# Altium PCB GateDrive.PcbDoc (part 3 of 3)
Units mm, origin at the board's own origin, x right, y up, seen from the top; angles counter-clockwise.
Board outline 204.3 x 103 mm, 4 copper layers (Top Layer, Internal Plane 1, Internal Plane 2, Bottom Layer), stack 0.778 mm thick; 236 components, 133 nets, 651 pads, 165 vias.
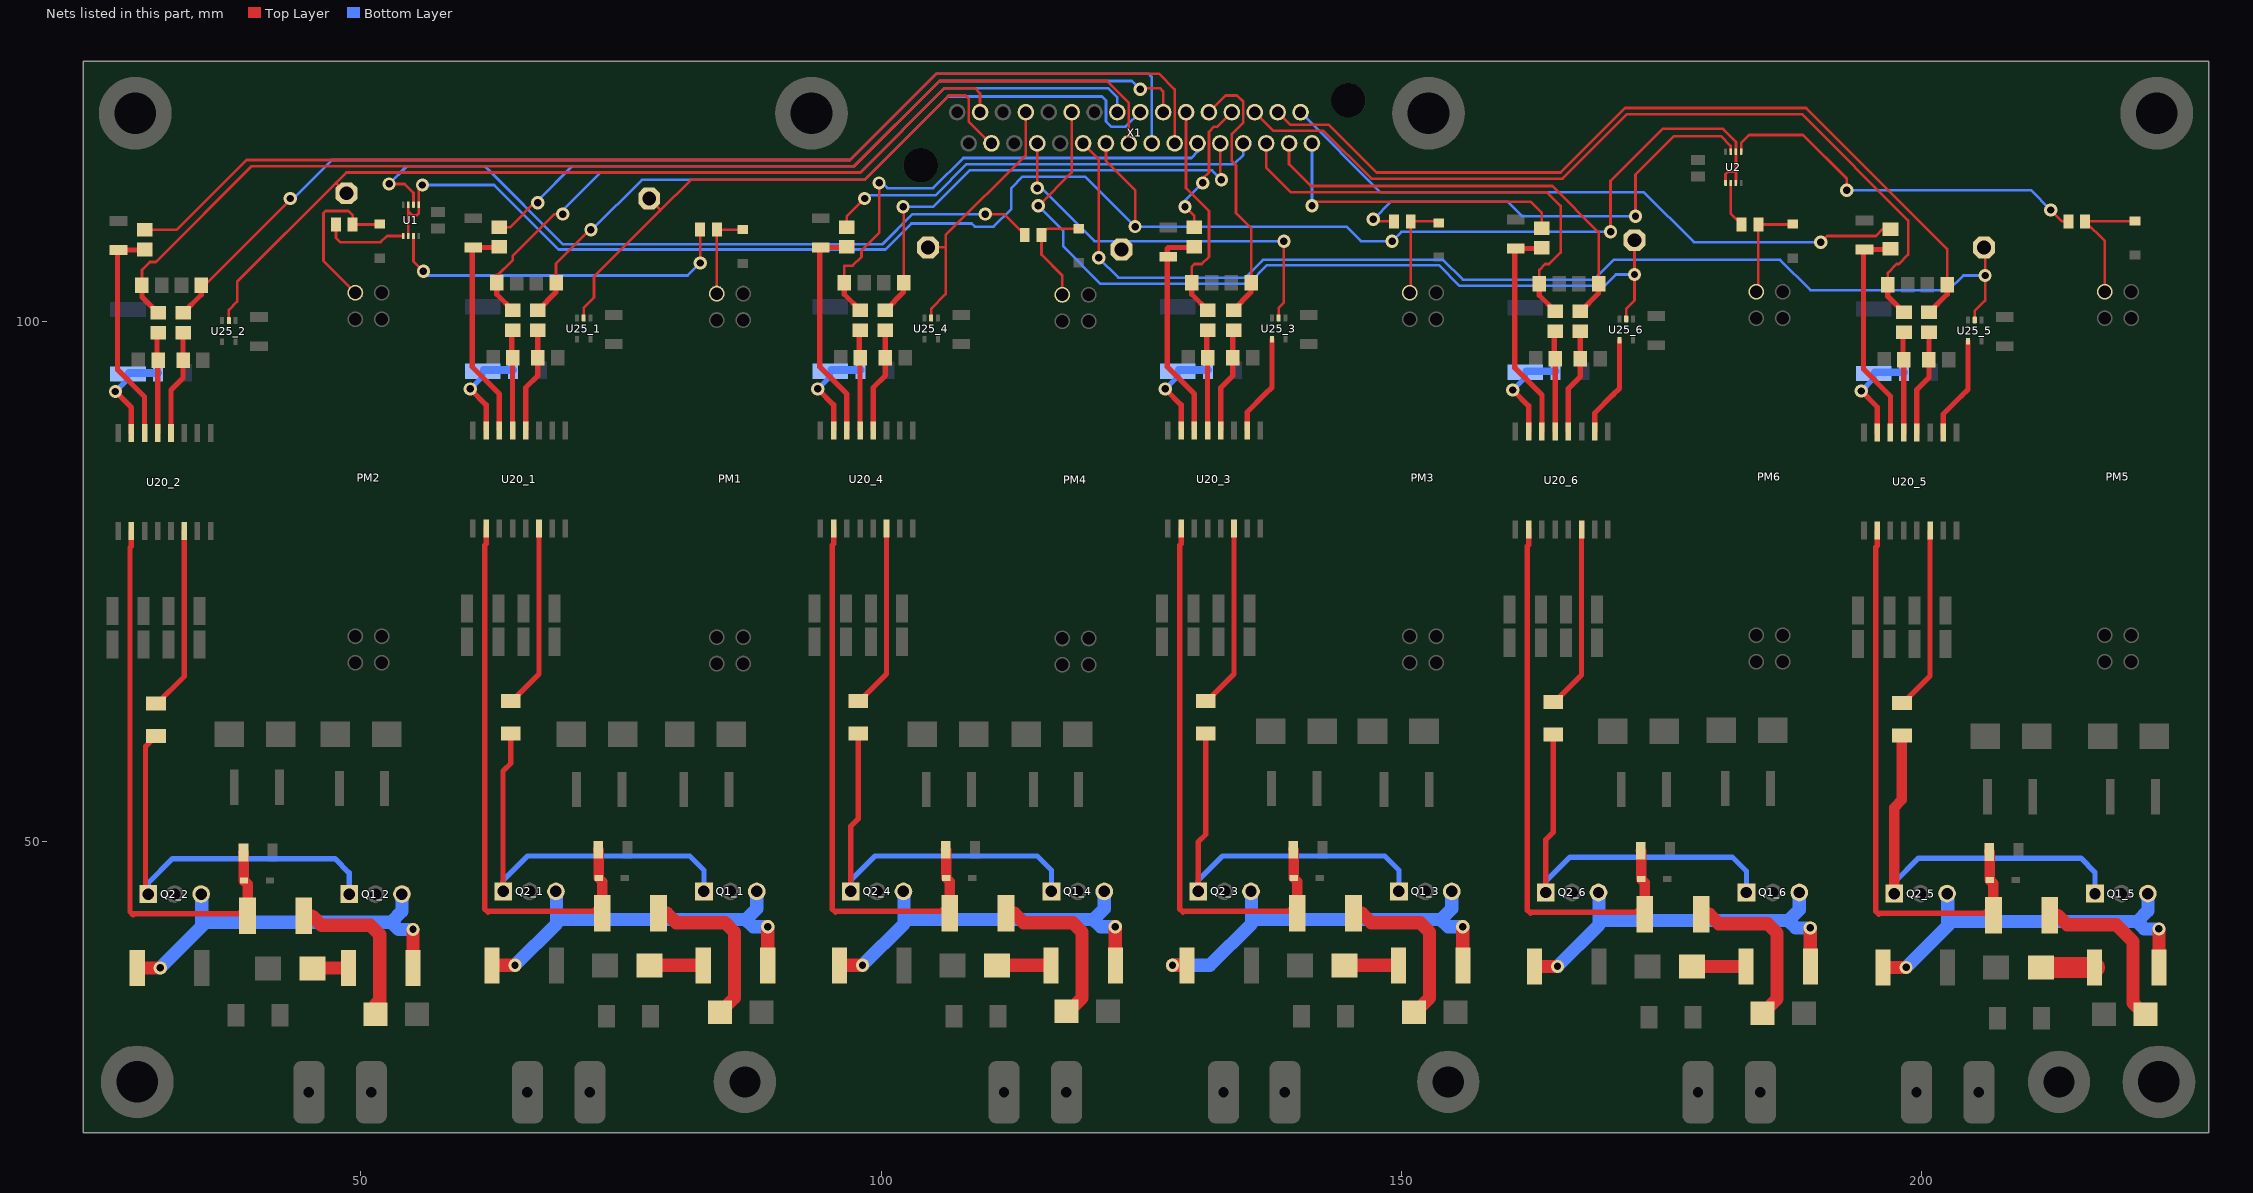
[diagram p4: the nets of this part, all layers, seen from the top]

## Via types
v1: diameter 1.27, hole 0.711, Top Layer to Bottom Layer, 154 vias
v2: diameter 2, hole 1, Top Layer to Bottom Layer, 11 vias

## Nets (pads, with @x,y where several pads share a name; then routed paths per layer and width w, separated by ;. In a path a pad name is that pad's centre, name@x,y a point inside that pad or via, vN(x,y) a via of type N, cw(c..) or ccw(c..) an arc to the next point about the centre after c; other vN are vias at no path point) (continued)
IGBT_VPHASE_T: U20_3.10 U25_3.4 | length 9.8
  Top Layer w0.508: U20_3.10@135.18,89.5 135.18,91.28 136.95,93.05 137.55,93.65 U25_3.4@137.55,98.275
IGBT_WPHASE_B: U20_6.10 U25_6.4 | length 9.8
  Top Layer w0.508: U20_6.10@168.58,89.4 168.58,91.18 170.35,92.95 170.95,93.55 U25_6.4@170.95,98.175
IGBT_WPHASE_T: U20_5.10 U25_5.4 | length 9.8
  Top Layer w0.508: U20_5.10@202.08,89.3 202.08,91.08 203.85,92.85 204.45,93.45 U25_5.4@204.45,98.075
NetC25_1: C25.1 U1.7 | length 34.3
  Top Layer w0.254: U1.7@55.05,108.2 55.05,105.75 v1(56,104.8) ; v1(82.6,105.6) C25.1@82.6,108.8
  Bottom Layer w0.254: v1(56,104.8) 56.4,104.4 81.4,104.4 v1(82.6,105.6)
NetC25_2: C25.2 D1.2 PM1.1 | length 8.7
  Top Layer w0.254: PM1.1@84.2,102.66 C25.2@84.2,108.8 86.665,108.8 D1.2@86.7,108.835
NetC26_1: C26.1 U1.5 | length 8.2
  Top Layer w0.254: C26.1@47.6,109.3 47.6,108 48,107.6 51.9,107.6 52.5,108.2 U1.5@54.05,108.2
NetC26_2: C26.2 D2.2 PM2.1 | length 15.5
  Top Layer w0.254: PM2.1@49.46,102.74 46.4,105.8 46.4,110.4 46.6,110.6 48.8,110.6 49.2,110.2 C26.2@49.2,109.3 51.765,109.3 D2.2@51.8,109.335
NetC27_1: C27.1 U2.7 | length 44.2
  Top Layer w0.254: v1(147.3,109.8) 147.5,109.6 C27.1@149.3,109.6 ; v1(172.5,110.1) 172.5,114.1 176.2,117.8 180.7,117.8 181.65,116.85 U2.7@181.65,116.3
  Bottom Layer w0.254: v1(147.3,109.8) 149,111.5 160.2,111.5 161.6,110.1 v1(172.5,110.1)
NetC27_2: C27.2 D3.2 PM3.1 | length 9.7
  Top Layer w0.254: PM3.1@150.8,102.74 150.9,102.84 C27.2@150.9,109.6 153.435,109.6 D3.2@153.6,109.435
NetC29_1: C29.1 U1.2 | length 70.8
  Top Layer w0.254: v1(52.7,113.2) 54.2,113.2 55.05,112.35 U1.2@55.05,111.2 ; v1(110,110.3) 111.8,110.3 C29.1@113.8,108.3
  Bottom Layer w0.254: v1(52.7,113.2) 54.4,114.9 61.9,114.9 69.4,107.4 100.1,107.4 103,110.3 v1(110,110.3)
NetC29_2: C29.2 D4.2 PM4.1 | length 10.4
  Top Layer w0.254: PM4.1@117.4,102.54 117.4,104.4 115.4,106.4 C29.2@115.4,108.3 116,108.9 D4.2@119,108.9
NetC30_1: C30.1 U2.5 | length 36.7
  Top Layer w0.254: U2.5@182.65,116.3 182.65,117.15 183.4,117.9 188.6,117.9 192.8,113.7 v1(192.8,112.6) ; v1(212.4,110.7) 213.5,109.6 C30.1@214.1,109.6
  Bottom Layer w0.254: v1(192.8,112.6) 210.5,112.6 v1(212.4,110.7)
NetC30_2: C30.2 D5.2 PM5.1 | length 12.4
  Top Layer w0.254: PM5.1@217.6,102.84 217.6,107.7 C30.2@215.7,109.6 220.465,109.6 D5.2@220.5,109.635
NetC31_1: C31.1 U2.2 | length 4.4
  Top Layer w0.254: U2.2@181.65,113.3 181.65,110.35 C31.1@182.7,109.3
NetC31_2: C31.2 D6.2 PM6.1 | length 9.9
  Top Layer w0.254: PM6.1@184.1,102.84 184.3,103.04 C31.2@184.3,109.3 187.565,109.3 D6.2@187.6,109.335
NetC67_1_2: C67_1.2 R44_1.2 U20_1.15 | length 9.9
  Top Layer w0.508: v1(60.5,93.5) 62.03,91.97 U20_1.15@62.03,89.5
  Bottom Layer w0.508: v1@60.6,93.5 v1(60.5,93.5) 61.7,94.7 R44_1.2@61.7,95.2 R44_1.2@61.8,95.3
  Bottom Layer w0.762: R44_1.2@61.8,95.3 C67_1.2@64.6,95.3
NetC67_2_2: C67_2.2 R44_2.2 U20_2.15 | length 9.9
  Top Layer w0.508: v1(26.4,93.25) 27.93,91.72 U20_2.15@27.93,89.25
  Bottom Layer w0.508: v1@26.5,93.25 v1(26.4,93.25) 27.6,94.45 R44_2.2@27.6,94.95 R44_2.2@27.7,95.05
  Bottom Layer w0.762: R44_2.2@27.7,95.05 C67_2.2@30.5,95.05
NetC67_3_2: C67_3.2 R44_3.2 U20_3.15 | length 9.9
  Top Layer w0.508: v1(127.3,93.5) 128.83,91.97 U20_3.15@128.83,89.5
  Bottom Layer w0.508: v1@127.4,93.5 v1(127.3,93.5) 128.5,94.7 R44_3.2@128.5,95.2 R44_3.2@128.6,95.3
  Bottom Layer w0.762: R44_3.2@128.6,95.3 C67_3.2@131.4,95.3
NetC67_4_2: C67_4.2 R44_4.2 U20_4.15 | length 9.9
  Top Layer w0.508: v1(93.9,93.5) 95.43,91.97 U20_4.15@95.43,89.5
  Bottom Layer w0.508: v1@94,93.5 v1(93.9,93.5) 95.1,94.7 R44_4.2@95.1,95.2 R44_4.2@95.2,95.3
  Bottom Layer w0.762: R44_4.2@95.2,95.3 C67_4.2@98,95.3
NetC67_5_2: C67_5.2 R44_5.2 U20_5.15 | length 9.9
  Top Layer w0.508: v1(194.2,93.3) 195.73,91.77 U20_5.15@195.73,89.3
  Bottom Layer w0.508: v1@194.3,93.3 v1(194.2,93.3) 195.4,94.5 R44_5.2@195.4,95 R44_5.2@195.5,95.1
  Bottom Layer w0.762: R44_5.2@195.5,95.1 C67_5.2@198.3,95.1
NetC67_6_2: C67_6.2 R44_6.2 U20_6.15 | length 9.9
  Top Layer w0.508: v1(160.7,93.4) 162.23,91.87 U20_6.15@162.23,89.4
  Bottom Layer w0.508: v1@160.8,93.4 v1(160.7,93.4) 161.9,94.6 R44_6.2@161.9,95.1 R44_6.2@162,95.2
  Bottom Layer w0.762: R44_6.2@162,95.2 C67_6.2@164.8,95.2
NetC72_1_2: C72_1.2 R47_1.1 U20_1.14 | length 21.2
  Top Layer w0.508: U20_1.14@63.3,89.5 63.3,93 60.7,95.6 60.7,107 C72_1.2@60.8,107.1 63.25,107.1 R47_1.1@63.3,107.15
NetC72_2_2: C72_2.2 R47_2.1 U20_2.14 | length 21.2
  Top Layer w0.508: U20_2.14@29.2,89.25 29.2,92.75 26.6,95.35 26.6,106.75 C72_2.2@26.7,106.85 29.15,106.85 R47_2.1@29.2,106.9
NetC72_3_2: C72_3.2 R47_3.1 U20_3.14 | length 21.2
  Top Layer w0.508: U20_3.14@130.1,89.5 130.1,93 127.5,95.6 127.5,107 127.6,107.1 130.05,107.1 R47_3.1@130.1,107.15
NetC72_4_2: C72_4.2 R47_4.1 U20_4.14 | length 21.2
  Top Layer w0.508: U20_4.14@96.7,89.5 96.7,93 94.1,95.6 94.1,107 C72_4.2@94.2,107.1 96.65,107.1 R47_4.1@96.7,107.15
NetC72_5_2: C72_5.2 R47_5.1 U20_5.14 | length 21.2
  Top Layer w0.508: U20_5.14@197,89.3 197,92.8 194.4,95.4 194.4,106.8 C72_5.2@194.5,106.9 196.95,106.9 R47_5.1@197,106.95
NetC72_6_2: C72_6.2 R47_6.1 U20_6.14 | length 21.2
  Top Layer w0.508: U20_6.14@163.5,89.4 163.5,92.9 160.9,95.5 160.9,106.9 C72_6.2@161,107 163.45,107 R47_6.1@163.5,107.05
NetC(Desat)1_1_2: C(Desat)1_1.2 D25_1.1 R43_1.1 U20_1.2 | length 54.8
  Top Layer w0.508: U20_1.2@62.03,80.102 62.03,78.63 61.9,78.5 61.9,43.5 62.2,43.2 62.2,43.3 72.3,43.3 73.2,44.2 R43_1.1@73.2,43.1
  Top Layer w1.016: 72.8,49.2 72.85,49.15 D25_1.1@72.85,46.5 73.2,46.15 R43_1.1@73.2,44.2
NetC(Desat)1_2_2: C(Desat)1_2.2 D25_2.1 R43_2.1 U20_2.2 | length 54.8
  Top Layer w0.508: U20_2.2@27.93,79.852 27.93,78.38 27.8,78.25 27.8,43.25 28.1,42.95 28.1,43.05 38.2,43.05 39.1,43.95 R43_2.1@39.1,42.85
  Top Layer w1.016: 38.7,48.95 38.75,48.9 D25_2.1@38.75,46.25 39.1,45.9 R43_2.1@39.1,43.95
NetC(Desat)1_3_2: C(Desat)1_3.2 D25_3.1 R43_3.1 U20_3.2 | length 54.8
  Top Layer w0.508: U20_3.2@128.83,80.102 128.83,78.63 128.7,78.5 128.7,43.5 129,43.2 129,43.3 139.1,43.3 140,44.2 R43_3.1@140,43.1
  Top Layer w1.016: 139.6,49.2 139.65,49.15 D25_3.1@139.65,46.5 140,46.15 R43_3.1@140,44.2
NetC(Desat)1_4_2: C(Desat)1_4.2 D25_4.1 R43_4.1 U20_4.2 | length 54.8
  Top Layer w0.508: U20_4.2@95.43,80.102 95.43,78.63 95.3,78.5 95.3,43.5 95.6,43.2 95.6,43.3 105.7,43.3 106.6,44.2 R43_4.1@106.6,43.1
  Top Layer w1.016: 106.2,49.2 106.25,49.15 D25_4.1@106.25,46.5 106.6,46.15 R43_4.1@106.6,44.2
NetC(Desat)1_5_2: C(Desat)1_5.2 D25_5.1 R43_5.1 U20_5.2 | length 54.8
  Top Layer w0.508: U20_5.2@195.73,79.902 195.73,78.43 195.6,78.3 195.6,43.3 195.9,43 195.9,43.1 206,43.1 206.9,44 R43_5.1@206.9,42.9
  Top Layer w1.016: 206.5,49 206.55,48.95 D25_5.1@206.55,46.3 206.9,45.95 R43_5.1@206.9,44
NetC(Desat)1_6_2: C(Desat)1_6.2 D25_6.1 R43_6.1 U20_6.2 | length 54.8
  Top Layer w0.508: U20_6.2@162.23,80.002 162.23,78.53 162.1,78.4 162.1,43.4 162.4,43.1 162.4,43.2 172.5,43.2 173.4,44.1 R43_6.1@173.4,43
  Top Layer w1.016: 173,49.1 173.05,49.05 D25_6.1@173.05,46.4 173.4,46.05 R43_6.1@173.4,44.1
NetD27_1_2: D27_1.2 RG1_1.2 | length 5.2
  Top Layer w1.27: D27_1.2@77.75,38.1 RG1_1.2@82.9,38.1
NetD27_2_2: D27_2.2 RG1_2.2 | length 3.3
  Top Layer w1.27: D27_2.2@45.5,37.85 RG1_2.2@48.8,37.85
NetD27_3_2: D27_3.2 RG1_3.2 | length 5.2
  Top Layer w1.27: D27_3.2@144.55,38.1 RG1_3.2@149.7,38.1
NetD27_4_2: D27_4.2 RG1_4.2 | length 5.2
  Top Layer w1.27: D27_4.2@111.15,38.1 RG1_4.2@116.3,38.1
NetD27_5_2: D27_5.2 RG1_5.2 | length 5.2
  Top Layer w2: D27_5.2@211.45,37.9 RG1_5.2@216.6,37.9
NetD27_6_2: D27_6.2 RG1_6.2 | length 5.2
  Top Layer w1.27: D27_6.2@177.95,38 RG1_6.2@183.1,38
NetD125_2: D125.2 R43_1.2 | length 16.3
  Top Layer w1.27: R43_1.2@78.6,43.1 79.4,43.1 80.3,42.2 85,42.2 85.9,41.3 85.9,34.994 D125.2@84.506,33.6
NetD126_2: D126.2 R43_2.2 | length 15.6
  Top Layer w1.27: R43_2.2@44.5,42.85 45.3,42.85 46.2,41.95 50.9,41.95 51.8,41.05 51.8,34.744 51.4,34.344 D126.2@51.4,33.7
NetD127_2: D127.2 R43_3.2 | length 16.3
  Top Layer w1.27: R43_3.2@145.4,43.1 146.2,43.1 147.1,42.2 151.8,42.2 152.7,41.3 152.7,34.994 D127.2@151.306,33.6
NetD128_2: D128.2 R43_4.2 | length 16.3
  Top Layer w1.27: R43_4.2@112,43.1 112.8,43.1 113.7,42.2 118.4,42.2 119.3,41.3 119.3,34.994 D128.2@117.906,33.6
NetD129_2: D129.2 R43_5.2 | length 16.5
  Top Layer w1.27: R43_5.2@212.3,42.9 213.1,42.9 214,42 218.7,42 220.3,40.4 220.3,34.494 D129.2@221.394,33.4
NetD130_2: D130.2 R43_6.2 | length 16.3
  Top Layer w1.27: R43_6.2@178.8,43 179.6,43 180.5,42.1 185.2,42.1 186.1,41.2 186.1,34.894 D130.2@184.706,33.5
NetQ1_1_1: Q1_1.1 Q2_1.1 RB1_1.2 | length 39.4
  Top Layer w0.508: Q2_1.1@63.66,45.2 63.66,56.76 64.4,57.5 RB1_1.2@64.4,60.4
  Bottom Layer w0.508: Q2_1.1@63.66,45.2 63.66,46.26 66,48.6 81.6,48.6 82.96,47.24 Q1_1.1@82.96,45.2
NetQ1_1_3: Q1_1.3 Q2_1.3 RG1_1.1 RG2_1.1 | length 38.7
  Top Layer w1.27: RG2_1.1@62.6,38.1 v1(64.8,38.1) ; RG1_1.1@89.1,38.1 v1(89.1,41.8)
  Bottom Layer w1.27: v1(64.8,38.1) 68.8,42.1 68.8,43.1 ; Q2_1.3@68.74,45.2 68.8,45.14 68.8,43.1 ; Q1_1.3@88.04,45.2 88.04,43.54 87,42.5 ; v1(89.1,41.8) 87.7,41.8 87,42.5 ; 68.8,43.1 69.4,42.5 87,42.5
NetQ1_2_1: Q1_2.1 Q2_2.1 RB1_2.2 | length 39.7
  Top Layer w0.508: Q2_2.1@29.56,44.95 29.3,45.21 29.3,59.15 RB1_2.2@30.3,60.15
  Bottom Layer w0.508: Q2_2.1@29.56,44.95 29.56,46.01 31.9,48.35 47.5,48.35 48.86,46.99 Q1_2.1@48.86,44.95
NetQ1_2_3: Q1_2.3 Q2_2.3 RG1_2.1 RG2_2.1 | length 38.7
  Top Layer w1.27: RG2_2.1@28.5,37.85 v1(30.7,37.85) ; RG1_2.1@55,37.85 v1(55,41.55)
  Bottom Layer w1.27: v1(30.7,37.85) 34.7,41.85 34.7,42.85 ; Q2_2.3@34.64,44.95 34.7,44.89 34.7,42.85 ; Q1_2.3@53.94,44.95 53.94,43.29 52.9,42.25 ; v1(55,41.55) 53.6,41.55 52.9,42.25 ; 34.7,42.85 35.3,42.25 52.9,42.25
NetQ1_3_1: Q1_3.1 Q2_3.1 RB1_3.2 | length 39.4
  Top Layer w0.508: Q2_3.1@130.46,45.2 130.46,49.96 131.2,50.7 RB1_3.2@131.2,60.4
  Bottom Layer w0.508: Q2_3.1@130.46,45.2 130.46,46.26 132.8,48.6 148.4,48.6 149.76,47.24 Q1_3.1@149.76,45.2
NetQ1_3_3: Q1_3.3 Q2_3.3 RG1_3.1 RG2_3.1 | length 41.5
  Top Layer w1.27: v1(128,38.1) RG2_3.1@129.4,38.1 ; RG1_3.1@155.9,38.1 v1(155.9,41.8)
  Bottom Layer w1.27: v1(128,38.1) 131.6,38.1 135.6,42.1 135.6,43.1 ; Q2_3.3@135.54,45.2 135.6,45.14 135.6,43.1 ; Q1_3.3@154.84,45.2 154.84,43.54 153.8,42.5 ; v1(155.9,41.8) 154.5,41.8 153.8,42.5 ; 135.6,43.1 136.2,42.5 153.8,42.5
NetQ1_4_1: Q1_4.1 Q2_4.1 RB1_4.2 | length 39.4
  Top Layer w0.508: Q2_4.1@97.06,45.2 97.06,51.46 97.8,52.2 RB1_4.2@97.8,60.4
  Bottom Layer w0.508: Q2_4.1@97.06,45.2 97.06,46.26 99.4,48.6 115,48.6 116.36,47.24 Q1_4.1@116.36,45.2
NetQ1_4_3: Q1_4.3 Q2_4.3 RG1_4.1 RG2_4.1 | length 38.7
  Top Layer w1.27: RG2_4.1@96,38.1 v1(98.2,38.1) ; RG1_4.1@122.5,38.1 v1(122.5,41.8)
  Bottom Layer w1.27: v1(98.2,38.1) 102.2,42.1 102.2,43.1 ; Q2_4.3@102.14,45.2 102.2,45.14 102.2,43.1 ; Q1_4.3@121.44,45.2 121.44,43.54 120.4,42.5 ; v1(122.5,41.8) 121.1,41.8 120.4,42.5 ; 102.2,43.1 102.8,42.5 120.4,42.5
NetQ1_5_1: Q1_5.1 Q2_5.1 RB1_5.2 | length 39.4
  Top Layer w1: Q2_5.1@197.36,45 197.36,53.26 198.1,54 RB1_5.2@198.1,60.2
  Bottom Layer w0.508: Q2_5.1@197.36,45 197.36,46.06 199.7,48.4 215.3,48.4 216.66,47.04 Q1_5.1@216.66,45
NetQ1_5_3: Q1_5.3 Q2_5.3 RG1_5.1 RG2_5.1 | length 38.7
  Top Layer w1.27: RG2_5.1@196.3,37.9 v1(198.5,37.9) ; RG1_5.1@222.8,37.9 v1(222.8,41.6)
  Bottom Layer w1.27: v1(198.5,37.9) 202.5,41.9 202.5,42.9 ; Q2_5.3@202.44,45 202.5,44.94 202.5,42.9 ; Q1_5.3@221.74,45 221.74,43.34 220.7,42.3 ; v1(222.8,41.6) 221.4,41.6 220.7,42.3 ; 202.5,42.9 203.1,42.3 220.7,42.3
NetQ1_6_1: Q1_6.1 Q2_6.1 RB1_6.2 | length 39.4
  Top Layer w0.508: Q2_6.1@163.86,45.1 163.86,50.16 164.6,50.9 RB1_6.2@164.6,60.3
  Bottom Layer w0.508: Q2_6.1@163.86,45.1 163.86,46.16 166.2,48.5 181.8,48.5 183.16,47.14 Q1_6.1@183.16,45.1
NetQ1_6_3: Q1_6.3 Q2_6.3 RG1_6.1 RG2_6.1 | length 38.7
  Top Layer w1.27: RG2_6.1@162.8,38 v1(165,38) ; RG1_6.1@189.3,38 v1(189.3,41.7)
  Bottom Layer w1.27: v1(165,38) 169,42 169,43 ; Q2_6.3@168.94,45.1 169,45.04 169,43 ; Q1_6.3@188.24,45.1 188.24,43.44 187.2,42.4 ; v1(189.3,41.7) 187.9,41.7 187.2,42.4 ; 169,43 169.6,42.4 187.2,42.4
NetR45_1_1: R45_1.1 R94_1.1 U20_1.13 | length 9.7
  Top Layer w0.508: R94_1.1@64.5,99.15 64.5,96.54 64.57,96.47 U20_1.13@64.57,89.5
NetR45_2_1: R45_2.1 R94_2.1 U20_2.13 | length 9.7
  Top Layer w0.508: R94_2.1@30.4,98.9 30.4,96.29 30.47,96.22 U20_2.13@30.47,89.25
NetR45_3_1: R45_3.1 R94_3.1 U20_3.13 | length 9.7
  Top Layer w0.508: R94_3.1@131.3,99.15 131.3,96.54 131.37,96.47 U20_3.13@131.37,89.5
NetR45_4_1: R45_4.1 R94_4.1 U20_4.13 | length 9.7
  Top Layer w0.508: R94_4.1@97.9,99.15 97.9,96.54 97.97,96.47 U20_4.13@97.97,89.5
NetR45_5_1: R45_5.1 R94_5.1 U20_5.13 | length 9.7
  Top Layer w0.508: R94_5.1@198.2,98.95 198.2,96.34 198.27,96.27 U20_5.13@198.27,89.3
NetR45_6_1: R45_6.1 R94_6.1 U20_6.13 | length 9.7
  Top Layer w0.508: R94_6.1@164.7,99.05 164.7,96.44 164.77,96.37 U20_6.13@164.77,89.4
NetR46_1_1: R46_1.1 R93_1.1 U20_1.12 | length 10.1
  Top Layer w0.508: U20_1.12@65.84,89.5 65.84,93.64 67,94.8 R46_1.1@67,96.5 R93_1.1@67,99.15
NetR46_2_1: R46_2.1 R93_2.1 U20_2.12 | length 10.1
  Top Layer w0.508: U20_2.12@31.74,89.25 31.74,93.39 32.9,94.55 R46_2.1@32.9,96.25 R93_2.1@32.9,98.9
NetR46_3_1: R46_3.1 R93_3.1 U20_3.12 | length 10.1
  Top Layer w0.508: U20_3.12@132.64,89.5 132.64,93.64 133.8,94.8 R46_3.1@133.8,96.5 R93_3.1@133.8,99.15
NetR46_4_1: R46_4.1 R93_4.1 U20_4.12 | length 10.1
  Top Layer w0.508: U20_4.12@99.24,89.5 99.24,93.64 100.4,94.8 R46_4.1@100.4,96.5 R93_4.1@100.4,99.15
NetR46_5_1: R46_5.1 R93_5.1 U20_5.12 | length 10.1
  Top Layer w0.508: U20_5.12@199.54,89.3 199.54,93.44 200.7,94.6 R46_5.1@200.7,96.3 R93_5.1@200.7,98.95
NetR46_6_1: R46_6.1 R93_6.1 U20_6.12 | length 10.1
  Top Layer w0.508: U20_6.12@166.04,89.4 166.04,93.54 167.2,94.7 R46_6.1@167.2,96.4 R93_6.1@167.2,99.05
NetR47_1_2: R47_1.2 X1.19 | length 72.2
  Top Layer w0.254: R47_1.2@63.3,109.05 64.35,109.05 66.7,111.4 v1(67,111.4) ; v1(124.9,122.3) 125,122.4 126.8,122.4 127.1,122.1 X1.19@127.1,120.1
  Bottom Layer w0.254: v1(67,111.4) 67,111.6 70.3,114.9 97.4,114.9 105.6,123.1 124.1,123.1 v1(124.9,122.3)
NetR47_2_2: R47_2.2 X1.20 | length 111
  Top Layer w0.254: R47_2.2@29.2,108.8 32.3,108.8 39,115.5 97,115.5 105.3,123.8 126.7,123.8 128.2,122.3 X1.20@128.2,117.1
NetR47_3_2: R47_3.2 X1.25 | length 13.5
  Top Layer w0.254: v1(129.2,111) 130.1,110.1 R47_3.2@130.1,109.05 ; v1(130.9,113.3) 130.9,113.7 131.5,114.3 131.5,118.2 132,118.7 132.3,118.7 X1.25@133.7,120.1
  Bottom Layer w0.254: v1(129.2,111) 129.2,111.6 v1(130.9,113.3)
NetR47_4_2: R47_4.2 X1.26 | length 42.7
  Top Layer w0.254: R47_4.2@96.7,109.05 96.7,110.1 v1(98.4,111.8)
  Bottom Layer w0.254: v1(98.4,111.8) 98.7,112.1 105.2,112.1 108.2,115.1 133.9,115.1 134.8,116 X1.26@134.8,117.1
NetR47_5_2: R47_5.2 X1.31 | length 62.4
  Top Layer w0.254: v1(190.3,107.6) 190.9,108.2 195.6,108.2 196.25,108.85 R47_5.2@197,108.85
  Bottom Layer w0.254: X1.31@140.3,120.1 148,112.4 173.3,112.4 178.1,107.6 v1(190.3,107.6)
NetR47_6_2: R47_6.2 X1.32 | length 30.2
  Top Layer w0.254: v1(141.4,111.1) 141.8,111.5 162.4,111.5 163.5,110.4 R47_6.2@163.5,108.95
  Bottom Layer w0.254: v1(141.4,111.1) X1.32@141.4,117.1
NetR93_1_2: R93_1.2 R95_1.1 X1.17 | length 71
  Top Layer w0.254: R95_1.1@68.75,103.4 R95_1.1@68.75,103.7 68.75,105.55 72,108.8 v1(72.1,108.8)
  Top Layer w0.508: R93_1.2@67,101.05 68.75,102.8 R95_1.1@68.75,103.4
  Bottom Layer w0.254: v1(72.1,108.8) 72.2,108.8 77,113.6 98.4,113.6 106.4,121.6 121.2,121.6 121.6,121.2 121.6,119.2 122.1,118.7 123.5,118.7 X1.17@124.9,120.1
NetR93_2_2: R93_2.2 R95_2.1 X1.18 | length 109.9
  Top Layer w0.254: R95_2.1@34.65,103.45 34.95,103.45 43.3,111.8 v1(43.2,111.8)
  Top Layer w0.508: R93_2.2@32.9,100.8 34.65,102.55 R95_2.1@34.65,103.45
  Bottom Layer w0.254: v1(43.2,111.8) 43.5,111.8 47.2,115.5 97,115.5 105.3,123.8 125.7,123.8 126,123.5 X1.18@126,117.1
NetR93_3_2: R93_3.2 R95_3.1 X1.23 | length 26.2
  Top Layer w0.254: X1.23@131.5,120.1 133.1,121.7 134.2,121.7 134.8,121.1 134.8,119.1 133.7,118 133.7,115.4 134.1,115 134.1,110.4 135.55,108.95 R95_3.1@135.55,103.7
  Top Layer w0.508: R93_3.2@133.8,101.05 135.55,102.8 R95_3.1@135.55,103.7
NetR93_4_2: R93_4.2 R95_4.1 X1.24 | length 46.7
  Top Layer w0.254: v1(102.1,111) 102.15,110.95 R95_4.1@102.15,103.7 ; X1.24@132.6,117.1 132.6,113.7 v1(132.7,113.6)
  Top Layer w0.508: R93_4.2@100.4,101.05 102.15,102.8 R95_4.1@102.15,103.7
  Bottom Layer w0.254: v1(102.1,111) 105,111 108.5,114.5 131.8,114.5 v1(132.7,113.6)
NetR93_5_2: R93_5.2 R95_5.1 X1.29 | length 81.8
  Top Layer w0.254: X1.29@138.1,120.1 139.3,118.9 143,118.9 147.6,114.3 165.3,114.3 171.5,120.5 188.9,120.5 202.45,106.95 R95_5.1@202.45,103.5
  Top Layer w0.508: R93_5.2@200.7,100.85 202.45,102.6 R95_5.1@202.45,103.5
NetR93_6_2: R93_6.2 R95_6.1 X1.30 | length 42.8
  Top Layer w0.254: X1.30@139.2,117.1 139.2,115.1 141.3,113 164.5,113 168.95,108.55 R95_6.1@168.95,103.6
  Top Layer w0.508: R93_6.2@167.2,100.95 168.95,102.7 R95_6.1@168.95,103.6
NetR94_1_2: R94_1.2 R96_1.1 X1.15 | length 73.3
  Top Layer w0.254: R96_1.1@63.05,104.35 64.6,105.9 64.6,106.3 68.6,110.3 v1(69.4,110.3)
  Top Layer w0.508: R96_1.1@63.05,104.35 R96_1.1@63.05,103.7 63.05,102.6 R94_1.2@64.6,101.05
  Bottom Layer w0.254: v1(69.4,110.3) 69.4,110.7 73,114.3 98,114.3 106.1,122.4 121.8,122.4 122.7,121.5 X1.15@122.7,120.096
NetR94_2_2: R94_2.2 R96_2.1 X1.16 | length 111.9
  Top Layer w0.254: R96_2.1@28.95,103.45 28.95,104.95 29.7,105.7 30.3,105.7 39.5,114.9 97.4,114.9 105.6,123.1 121.7,123.1 123.8,121 X1.16@123.8,117.1
  Top Layer w0.508: R96_2.1@28.95,103.45 28.95,102.35 R94_2.2@30.5,100.8
NetR94_3_2: R94_3.2 R96_3.1 X1.21 | length 21.7
  Top Layer w0.254: X1.21@129.3,120.1 129.3,112.8 131.5,110.6 131.5,106.2 130.8,105.5 130.1,105.5 129.85,105.25 R96_3.1@129.85,103.7
  Top Layer w0.508: R96_3.1@129.85,103.7 129.85,102.6 R94_3.2@131.4,101.05
NetR94_4_2: R94_4.2 R96_4.1 X1.22 | length 48.2
  Top Layer w0.254: R96_4.1@96.45,103.7 96.45,105.35 97.25,105.35 98.1,106.2 98.1,106.8 99.8,108.5 v1(99.8,113.3)
  Top Layer w0.508: R96_4.1@96.45,103.7 96.45,102.6 R94_4.2@98,101.05
  Bottom Layer w0.254: v1(99.8,113.3) 99.8,113.6 100.6,112.8 105,112.8 107.9,115.7 129.8,115.7 130.4,116.3 X1.22@130.4,117.1
NetR94_5_2: R94_5.2 R96_5.1 X1.27 | length 82.7
  Top Layer w0.254: X1.27@135.9,120.1 137.7,118.3 142.5,118.3 147.1,113.7 165.5,113.7 171.7,119.9 188.5,119.9 198.7,109.7 198.7,106.4 197.8,105.5 197.6,105.5 196.75,104.65 R96_5.1@196.75,103.5
  Top Layer w0.508: R96_5.1@196.75,103.5 196.75,102.4 R94_5.2@198.3,100.85
NetR94_6_2: R94_6.2 R96_6.1 X1.28 | length 44
  Top Layer w0.254: X1.28@137,117.1 137,114.8 139.4,112.4 164,112.4 165.3,111.1 165.3,106.6 164.2,105.5 163.8,105.5 163.25,104.95 R96_6.1@163.25,103.6
  Top Layer w0.508: R96_6.1@163.25,103.6 163.25,102.5 R94_6.2@164.8,100.95
NetRB1_1_1: RB1_1.1 U20_1.6 | length 17.8
  Top Layer w0.508: RB1_1.1@64.4,63.5 64.5,63.5 67.11,66.11 U20_1.6@67.11,80.102
NetRB1_2_1: RB1_2.1 U20_2.6 | length 17.8
  Top Layer w0.508: RB1_2.1@30.3,63.25 30.4,63.25 33.01,65.86 U20_2.6@33.01,79.852
NetRB1_3_1: RB1_3.1 U20_3.6 | length 17.8
  Top Layer w0.508: RB1_3.1@131.2,63.5 131.3,63.5 133.91,66.11 U20_3.6@133.91,80.102
NetRB1_4_1: RB1_4.1 U20_4.6 | length 17.8
  Top Layer w0.508: RB1_4.1@97.8,63.5 97.9,63.5 100.51,66.11 U20_4.6@100.51,80.102
NetRB1_5_1: RB1_5.1 U20_5.6 | length 17.8
  Top Layer w0.508: RB1_5.1@198.1,63.3 198.2,63.3 200.81,65.91 U20_5.6@200.81,79.902
NetRB1_6_1: RB1_6.1 U20_6.6 | length 17.8
  Top Layer w0.508: RB1_6.1@164.6,63.4 164.7,63.4 167.31,66.01 U20_6.6@167.31,80.002
NetU1_1: U1.1 U1.3 U1.6 U2.1 U2.3 U2.6 X1.14 | length 165.7
  Top Layer w0.254: U1.6@54.55,108.2 54.55,110.55 ; U1.3@54.55,111.2 54.55,110.55 ; v1(55.9,113.1) 55.55,112.75 U1.1@55.55,111.2 55.55,110.35 55.4,110.2 54.9,110.2 54.55,110.55 ; X1.14@121.6,117.1 121.6,115.4 124.4,112.6 v1(124.4,109.1) ; v1(170.1,108.6) 170.1,113.5 175.1,118.5 180.9,118.5 182.15,117.25 U2.6@182.15,116.3 182.15,114.4 ; U2.1@181.15,113.3 181.15,114.15 181.4,114.4 182.15,114.4 ; U2.3@182.15,113.3 182.15,114.4
  Bottom Layer w0.254: v1(55.9,113.1) 62.8,113.1 69,106.9 100.4,106.9 102.9,109.4 108.7,109.4 109,109.1 110.8,109.1 112.5,110.8 112.5,112.8 113.6,113.9 119.6,113.9 v1(124.4,109.1) 144.7,109.1 146.1,107.7 v1(149.1,107.7) 150,108.6 v1(170.1,108.6)
PA8/TIM_CH1: TP2.TP U25_1.2 X1.4 | length 54.6
  Top Layer w0.254: U25_1.2@71.4,100.325 71.4,101.3 72.4,102.3 72.4,104.3 78.75,110.65 ; TP2.TP@77.7,111.8 78.75,110.75 78.75,110.65 ; X1.4@110.6,117.1 110.5,117.1 108.4,119.2 108.4,121.4 108.1,121.7 106.5,121.7 98.4,113.6 81.7,113.6 78.75,110.65
PA9/TIM_CH2: TP4.TP U25_3.2 X1.8 | length 37.7
  Top Layer w0.254: v1(115,112.8) X1.8@115,117.1 ; U25_3.2@138.2,100.325 138.2,101.3 138.7,101.8 v1(138.7,107.7)
  Bottom Layer w0.254: v1(115,112.8) 115.4,112.8 120.5,107.7 v1(138.7,107.7)
PA10/TIM1_CH3: TP6.TP U25_5.2 X1.12 | length 109.1
  Top Layer w0.254: X1.12@119.4,117.1 120.9,115.6 v1(120.9,106.1) ; U25_5.2@205.1,100.125 205.1,101 206.1,102 v1(206.1,104.4) 206.1,107 TP6.TP@206,107.1
  Bottom Layer w0.254: v1(120.9,106.1) 122.8,104.2 135,104.2 136.7,105.9 154,105.9 155.9,104 168.5,104 170.4,105.9 186.4,105.9 189.3,103 202.6,103 204,104.4 v1(206.1,104.4)
TIM1_CH1N: TP1.TP U25_2.2 X1.3 | length 86.6
  Top Layer w0.254: U25_2.2@37.3,100.075 37.3,101.1 38.1,101.9 38.1,103.8 47.6,113.3 ; TP1.TP@48.6,112.3 47.6,113.3 ; X1.3@109.5,120.1 109.5,121.9 109,122.4 106.1,122.4 98,114.3 48.6,114.3 47.6,113.3
TIM1_CH2N: TP3.TP U25_4.2 X1.7 | length 25.2
  Top Layer w0.254: TP3.TP@104.5,107.1 106.2,107.1 ; U25_4.2@104.8,100.325 104.8,101.2 106.2,102.6 106.2,108.3 113.9,116 X1.7@113.9,120.1
TIM1_CH3N: TP5.TP U25_6.2 X1.11 | length 81.5
  Top Layer w0.254: v1(115.1,111.1) 118.3,114.3 X1.11@118.3,120.1 ; U25_6.2@171.6,100.225 171.6,101.2 172.4,102 v1(172.4,104.5) TP5.TP@172.4,107.8
  Bottom Layer w0.254: v1(115.1,111.1) 117.5,108.7 117.5,107.2 121.1,103.6 135.3,103.6 137.1,105.4 153.6,105.4 155.6,103.4 169.5,103.4 170.6,104.5 v1(172.4,104.5)
pads on no net: PM1.5 PM2.5 PM3.5 PM4.5 PM5.5 PM6.5 U20_1.4 U20_1.7 U20_2.4 U20_2.7 U20_3.4 U20_3.7 U20_4.4 U20_4.7 U20_5.4 U20_5.7 U20_6.4 U20_6.7 U25_1.1 U25_2.1 U25_3.1 U25_4.1 U25_5.1 U25_6.1 X1.33 X1.34
copper on no net:
  other v1: 166.2,32.5 99.4,32.6

## Polygon pours and split planes (outlines as drawn)
COMMON3 on Internal Plane 1 (split plane): 143,72.5 157.298,72.5 157.298,32.202 126.102,32.202 126.102,81.2 143,81.2
COMMON4 on Internal Plane 1 (split plane): 109.7,72.2 124.098,72.2 124.098,32.202 92.702,32.202 92.702,81.2 109.7,81.2
COMMON5 on Internal Plane 1 (split plane): 209.8,72.4 225.3,72.4 225.3,32.202 192.802,32.202 192.802,81.2 209.8,81.2
COMMON6 on Internal Plane 1 (split plane): 176.4,72.3 190.798,72.3 190.798,32.202 159.302,32.202 159.302,81.2 176.4,81.2
GND on Internal Plane 1 (split plane): 227.09,94.6 209.8,94.6 209.8,89 191.1,89 191.1,94.8 176.4,94.8 176.4,89 157.7,89 157.7,94.5 143,94.5 143,89 124.4,89 124.4,94.3 109.7,94.3 109.7,89 91.6,89 91.6,94.1 76.5,94.1 76.5,89 57.7,89 57.7,94.9 41.9,94.9 41.9,89 23.81,89 23.81,124.49 227.09,124.49
COMMON2 on Internal Plane 1 (split plane): 41.9,72.5 57.298,72.5 57.298,32.202 25.3,32.202 25.3,81.2 41.9,81.2
COMMON1 on Internal Plane 1 (split plane): 76.5,71.7 90.698,71.7 90.698,32.202 59.302,32.202 59.302,81.2 76.5,81.2
-8.5VT5 on Internal Plane 2 (split plane): 207.8,72.4 215.298,72.4 215.298,68.5 215.307,68.402 215.336,68.308 215.382,68.221 215.445,68.145 215.521,68.082 215.608,68.036 215.702,68.007 215.8,67.998 221.298,67.998 221.298,64.402 208.6,64.402 208.502,64.393 208.408,64.364 208.321,64.318 208.245,64.255 208.182,64.179 208.136,64.092 208.107,63.998 208.098,63.9 208.098,40.302 197.102,40.302 197.102,47.698 198.5,47.698 198.598,47.707 198.692,47.736 198.779,47.782 198.798,47.798 199.2,47.798 199.25,47.803 199.3,47.798 199.398,47.807 199.492,47.836 199.579,47.882 199.655,47.945 199.718,48.021 199.764,48.108 199.793,48.202 199.802,48.3 199.802,72.498 207.7,72.498 207.798,72.507 207.8,72.508
-8.5VT6 on Internal Plane 2 (split plane): 173.1,72.3 181.698,72.3 181.698,68.5 181.707,68.402 181.736,68.308 181.782,68.221 181.845,68.145 181.921,68.082 182.008,68.036 182.102,68.007 182.2,67.998 187.698,67.998 187.698,64.402 175,64.402 174.902,64.393 174.808,64.364 174.721,64.318 174.645,64.255 174.582,64.179 174.536,64.092 174.507,63.998 174.498,63.9 174.498,40.302 174.399,40.302 174.355,40.355 174.279,40.418 174.192,40.464 174.098,40.493 174,40.502 163.502,40.502 163.502,47.798 165.6,47.798 165.65,47.803 165.7,47.798 165.798,47.807 165.892,47.836 165.979,47.882 166.055,47.945 166.118,48.021 166.164,48.108 166.193,48.202 166.202,48.3 166.202,72.498 173.1,72.498
-8.5VT3 on Internal Plane 2 (split plane): 148.498,68.5 148.507,68.402 148.536,68.308 148.582,68.221 148.645,68.145 148.721,68.082 148.808,68.036 148.902,68.007 149,67.998 154.498,67.998 154.498,64.402 141.8,64.402 141.702,64.393 141.608,64.364 141.521,64.318 141.445,64.255 141.382,64.179 141.336,64.092 141.307,63.998 141.298,63.9 141.298,40.302 141.059,40.302 141.018,40.379 140.955,40.455 140.879,40.518 140.792,40.564 140.698,40.593 140.6,40.602 130.302,40.602 130.302,47.798 132.4,47.798 132.45,47.803 132.5,47.798 132.598,47.807 132.692,47.836 132.779,47.882 132.855,47.945 132.918,48.021 132.964,48.108 132.993,48.202 133.002,48.3 133.002,72.498 140.9,72.498 140.925,72.5 148.498,72.5
-8.5VT4 on Internal Plane 2 (split plane): 114.698,68.2 114.707,68.102 114.736,68.008 114.782,67.921 114.845,67.845 114.921,67.782 115.008,67.736 115.102,67.707 115.2,67.698 120.698,67.698 120.698,64.102 108,64.102 107.902,64.093 107.808,64.064 107.721,64.018 107.645,63.955 107.582,63.879 107.536,63.792 107.507,63.698 107.498,63.6 107.498,40.503 107.479,40.518 107.392,40.564 107.298,40.593 107.2,40.602 96.502,40.602 96.502,47.498 98.6,47.498 98.65,47.503 98.7,47.498 98.798,47.507 98.892,47.536 98.979,47.582 99.055,47.645 99.118,47.721 99.164,47.808 99.193,47.902 99.202,48 99.202,72.198 107.1,72.198 107.125,72.2 114.698,72.2
+15VT6 on Internal Plane 2 (split plane): 173.1,73.502 165.7,73.502 165.602,73.493 165.508,73.464 165.421,73.418 165.345,73.355 165.282,73.279 165.236,73.192 165.207,73.098 165.198,73 165.198,48.961 165.192,48.964 165.098,48.993 165,49.002 162.4,49.002 162.302,48.993 162.208,48.964 162.121,48.918 162.045,48.855 161.982,48.779 161.936,48.692 161.907,48.598 161.898,48.5 161.898,40 161.907,39.902 161.936,39.808 161.982,39.721 162.045,39.645 162.121,39.582 162.208,39.536 162.302,39.507 162.4,39.498 162.601,39.498 162.645,39.445 162.721,39.382 162.808,39.336 162.902,39.307 163,39.298 174.6,39.298 174.698,39.307 174.792,39.336 174.879,39.382 174.909,39.407 175,39.398 175.098,39.407 175.192,39.436 175.279,39.482 175.355,39.545 175.418,39.621 175.464,39.708 175.493,39.802 175.502,39.9 175.502,63.398 188.2,63.398 188.298,63.407 188.392,63.436 188.479,63.482 188.555,63.545 188.618,63.621 188.664,63.708 188.693,63.802 188.702,63.9 188.702,68.5 188.693,68.598 188.664,68.692 188.618,68.779 188.555,68.855 188.479,68.918 188.392,68.964 188.298,68.993 188.2,69.002 182.702,69.002 182.702,72.3 190.8,72.3 190.8,31.4 159.3,31.4 159.3,72.5 159.3,81.2 173.1,81.2
+15VT5 on Internal Plane 2 (split plane): 207.8,73.492 207.798,73.493 207.7,73.502 199.3,73.502 199.202,73.493 199.108,73.464 199.021,73.418 198.945,73.355 198.882,73.279 198.836,73.192 198.807,73.098 198.798,73 198.798,48.802 196.6,48.802 196.502,48.793 196.408,48.764 196.321,48.718 196.302,48.702 195.9,48.702 195.802,48.693 195.708,48.664 195.621,48.618 195.545,48.555 195.482,48.479 195.436,48.392 195.407,48.298 195.398,48.2 195.398,39.7 195.407,39.602 195.436,39.508 195.482,39.421 195.545,39.345 195.621,39.282 195.708,39.236 195.802,39.207 195.9,39.198 207.5,39.198 207.598,39.207 207.692,39.236 207.779,39.282 207.798,39.298 208.2,39.298 208.298,39.307 208.392,39.336 208.479,39.382 208.509,39.407 208.6,39.398 208.698,39.407 208.792,39.436 208.879,39.482 208.955,39.545 209.018,39.621 209.064,39.708 209.093,39.802 209.102,39.9 209.102,63.398 221.8,63.398 221.898,63.407 221.992,63.436 222.079,63.482 222.155,63.545 222.218,63.621 222.264,63.708 222.293,63.802 222.302,63.9 222.302,68.5 222.293,68.598 222.264,68.692 222.218,68.779 222.155,68.855 222.079,68.918 221.992,68.964 221.898,68.993 221.8,69.002 216.302,69.002 216.302,72.4 227.09,72.4 227.09,31.4 192.8,31.4 192.8,72.3 192.8,81.2 200.921,81.2 200.95,81.18 201,81.171 207.3,81.171 207.35,81.18 207.379,81.2 207.8,81.2
+15VT4 on Internal Plane 2 (split plane): 106.4,73.202 98.7,73.202 98.602,73.193 98.508,73.164 98.421,73.118 98.345,73.055 98.282,72.979 98.236,72.892 98.207,72.798 98.198,72.7 98.198,49.102 95.7,49.102 95.602,49.093 95.508,49.064 95.421,49.018 95.345,48.955 95.282,48.879 95.236,48.792 95.207,48.698 95.198,48.6 95.198,40.1 95.207,40.002 95.236,39.908 95.282,39.821 95.345,39.745 95.421,39.682 95.498,39.641 95.498,39.5 95.507,39.402 95.536,39.308 95.582,39.221 95.645,39.145 95.721,39.082 95.808,39.036 95.902,39.007 96,38.998 107.6,38.998 107.698,39.007 107.792,39.036 107.879,39.082 107.909,39.107 108,39.098 108.098,39.107 108.192,39.136 108.279,39.182 108.355,39.245 108.418,39.321 108.464,39.408 108.493,39.502 108.502,39.6 108.502,63.098 121.2,63.098 121.298,63.107 121.392,63.136 121.479,63.182 121.555,63.245 121.618,63.321 121.664,63.408 121.693,63.502 121.702,63.6 121.702,68.2 121.693,68.298 121.664,68.392 121.618,68.479 121.555,68.555 121.479,68.618 121.392,68.664 121.298,68.693 121.2,68.702 115.702,68.702 115.702,72.2 124.1,72.2 124.1,31.4 92.7,31.4 92.7,72.2 92.7,81.2 106.4,81.2
+15VT3 on Internal Plane 2 (split plane): 139.6,73.502 132.5,73.502 132.402,73.493 132.308,73.464 132.221,73.418 132.145,73.355 132.082,73.279 132.036,73.192 132.007,73.098 131.998,73 131.998,48.904 131.955,48.955 131.879,49.018 131.792,49.064 131.698,49.093 131.6,49.102 129,49.102 128.902,49.093 128.808,49.064 128.721,49.018 128.645,48.955 128.582,48.879 128.536,48.792 128.507,48.698 128.498,48.6 128.498,40.1 128.507,40.002 128.536,39.908 128.582,39.821 128.645,39.745 128.721,39.682 128.808,39.636 128.902,39.607 129,39.598 129.341,39.598 129.382,39.521 129.445,39.445 129.521,39.382 129.608,39.336 129.702,39.307 129.8,39.298 141.4,39.298 141.498,39.307 141.592,39.336 141.679,39.382 141.709,39.407 141.8,39.398 141.898,39.407 141.992,39.436 142.079,39.482 142.155,39.545 142.218,39.621 142.264,39.708 142.293,39.802 142.302,39.9 142.302,63.398 155,63.398 155.098,63.407 155.192,63.436 155.279,63.482 155.355,63.545 155.418,63.621 155.464,63.708 155.493,63.802 155.502,63.9 155.502,68.5 155.493,68.598 155.464,68.692 155.418,68.779 155.355,68.855 155.279,68.918 155.192,68.964 155.098,68.993 155,69.002 149.502,69.002 149.502,72.5 157.3,72.5 157.3,31.4 126.1,31.4 126.1,72.2 126.1,81.2 139.6,81.2
+5V on Internal Plane 2 (split plane): 185 vertices, not listed, extent 23.81,89 210.298,124.49
+12V on Internal Plane 2 (split plane): 227.09,94.5 211.302,94.5 211.302,97.5 211.302,117.2 211.293,117.298 211.264,117.392 211.218,117.479 211.155,117.555 211.079,117.618 210.992,117.664 210.898,117.693 210.8,117.702 189.1,117.702 189.002,117.693 188.908,117.664 188.821,117.618 188.745,117.555 188.682,117.479 188.636,117.392 188.607,117.298 188.598,117.2 188.598,97.102 180.602,97.102 180.602,117.1 180.593,117.198 180.564,117.292 180.518,117.379 180.455,117.455 180.379,117.518 180.292,117.564 180.198,117.593 180.1,117.602 155.9,117.602 155.802,117.593 155.708,117.564 155.621,117.518 155.545,117.455 155.482,117.379 155.436,117.292 155.407,117.198 155.398,117.1 155.398,99.002 154.3,99.002 154.202,98.993 154.108,98.964 154.021,98.918 153.945,98.855 153.392,98.302 149.108,98.302 148.555,98.855 148.479,98.918 148.392,98.964 148.298,98.993 148.2,99.002 147.402,99.002 147.402,122.5 147.393,122.598 147.364,122.692 147.318,122.779 147.255,122.855 147.179,122.918 147.092,122.964 146.998,122.993 146.9,123.002 114.1,123.002 114.002,122.993 113.908,122.964 113.821,122.918 113.745,122.855 113.682,122.779 113.636,122.692 113.607,122.598 113.598,122.5 113.598,112.825 113.607,112.727 113.636,112.633 113.682,112.546 113.745,112.47 113.821,112.407 113.908,112.361 114.002,112.332 114.1,112.323 121.998,112.323 121.998,97.902 110.133,97.902 109.48,98.555 109.404,98.618 109.317,98.664 109.223,98.693 109.125,98.702 105.402,98.702 105.402,117.1 105.393,117.198 105.364,117.292 105.318,117.379 105.255,117.455 105.179,117.518 105.092,117.564 104.998,117.593 104.9,117.602 98,117.602 97.902,117.593 97.808,117.564 97.721,117.518 97.645,117.455 97.582,117.379 97.536,117.292 97.507,117.198 97.498,117.1 97.498,115.402 89.3,115.402 89.202,115.393 89.108,115.364 89.021,115.318 88.945,115.255 88.882,115.179 88.836,115.092 88.807,114.998 88.798,114.9 88.798,98.202 81.102,98.202 81.102,120.3 81.093,120.398 81.064,120.492 81.018,120.579 80.955,120.655 80.879,120.718 80.792,120.764 80.698,120.793 80.6,120.802 54.6,120.802 54.502,120.793 54.408,120.764 54.321,120.718 54.245,120.655 54.182,120.579 54.136,120.492 54.107,120.398 54.098,120.3 54.098,97.802 45.702,97.802 45.702,124.49 227.09,124.49
+5V on Internal Plane 2 (split plane): 65.098,48.102 64.849,48.102 64.898,48.107 64.992,48.136 65.079,48.182 65.098,48.197
+5V on Internal Plane 2 (split plane): 62.802,48.093 62.708,48.064 62.702,48.061 62.702,48.098 62.851,48.098
+15VT1 on Internal Plane 2 (split plane): 73,72.802 65.6,72.802 65.502,72.793 65.408,72.764 65.321,72.718 65.245,72.655 65.182,72.579 65.136,72.492 65.107,72.398 65.098,72.3 65.098,49.003 65.079,49.018 64.992,49.064 64.898,49.093 64.8,49.102 62.2,49.102 62.102,49.093 62.008,49.064 61.921,49.018 61.845,48.955 61.782,48.879 61.736,48.792 61.707,48.698 61.698,48.6 61.698,40.1 61.707,40.002 61.736,39.908 61.782,39.821 61.845,39.745 61.921,39.682 62.008,39.636 62.102,39.607 62.2,39.598 62.398,39.598 62.398,39.1 62.407,39.002 62.436,38.908 62.482,38.821 62.545,38.745 62.621,38.682 62.708,38.636 62.802,38.607 62.9,38.598 74.5,38.598 74.598,38.607 74.692,38.636 74.779,38.682 74.809,38.707 74.9,38.698 74.998,38.707 75.092,38.736 75.179,38.782 75.255,38.845 75.318,38.921 75.364,39.008 75.393,39.102 75.402,39.2 75.402,62.698 88.1,62.698 88.198,62.707 88.292,62.736 88.379,62.782 88.455,62.845 88.518,62.921 88.564,63.008 88.593,63.102 88.602,63.2 88.602,67.8 88.593,67.898 88.564,67.992 88.533,68.051 88.564,68.11 88.593,68.204 88.602,68.302 88.593,68.4 88.564,68.495 88.518,68.582 88.455,68.658 88.379,68.72 88.292,68.767 88.198,68.795 88.1,68.805 85.298,68.805 85.273,68.802 82.602,68.802 82.602,71.7 90.7,71.7 90.7,31.4 59.3,31.4 59.3,72.5 59.3,81.2 73,81.2
-8.5VT1 on Internal Plane 2 (split plane): 73,71.7 81.598,71.7 81.598,68.3 81.607,68.202 81.636,68.108 81.682,68.021 81.745,67.945 81.821,67.882 81.908,67.836 82.002,67.807 82.1,67.798 85.3,67.798 85.325,67.8 87.598,67.8 87.598,63.702 74.9,63.702 74.802,63.693 74.708,63.664 74.621,63.618 74.545,63.555 74.482,63.479 74.436,63.392 74.407,63.298 74.398,63.2 74.398,39.602 73.849,39.602 73.898,39.607 73.992,39.636 74.079,39.682 74.155,39.745 74.218,39.821 74.264,39.908 74.293,40.002 74.302,40.1 74.293,40.198 74.264,40.292 74.218,40.379 74.155,40.455 74.079,40.518 73.992,40.564 73.898,40.593 73.8,40.602 63.402,40.602 63.402,47.098 65.5,47.098 65.55,47.103 65.6,47.098 65.698,47.107 65.792,47.136 65.879,47.182 65.955,47.245 66.018,47.321 66.064,47.408 66.093,47.502 66.102,47.6 66.102,71.798 73,71.798
+15VT2 on Internal Plane 2 (split plane): 33.108,81.158 33.15,81.13 33.2,81.121 39,81.121 39,73.502 30.8,73.502 30.702,73.493 30.608,73.464 30.521,73.418 30.445,73.355 30.382,73.279 30.336,73.192 30.307,73.098 30.298,73 30.298,48.802 28.1,48.802 28.002,48.793 27.908,48.764 27.821,48.718 27.745,48.655 27.682,48.579 27.636,48.492 27.607,48.398 27.598,48.3 27.598,39.8 27.607,39.702 27.636,39.608 27.682,39.521 27.745,39.445 27.821,39.382 27.908,39.336 28.002,39.307 28.1,39.298 39.7,39.298 39.798,39.307 39.892,39.336 39.979,39.382 40.009,39.407 40.1,39.398 40.198,39.407 40.292,39.436 40.379,39.482 40.455,39.545 40.518,39.621 40.564,39.708 40.593,39.802 40.602,39.9 40.602,63.398 53.3,63.398 53.398,63.407 53.492,63.436 53.579,63.482 53.655,63.545 53.718,63.621 53.764,63.708 53.793,63.802 53.802,63.9 53.802,68.5 53.793,68.598 53.764,68.692 53.718,68.779 53.655,68.855 53.579,68.918 53.492,68.964 53.398,68.993 53.3,69.002 47.802,69.002 47.802,72.5 57.3,72.5 57.3,31.4 23.81,31.4 23.81,81.2 33.081,81.2
-8.5VT2 on Internal Plane 2 (split plane): 46.798,68.5 46.807,68.402 46.836,68.308 46.882,68.221 46.945,68.145 47.021,68.082 47.108,68.036 47.202,68.007 47.3,67.998 52.798,67.998 52.798,64.402 40.1,64.402 40.002,64.393 39.908,64.364 39.821,64.318 39.745,64.255 39.682,64.179 39.636,64.092 39.607,63.998 39.598,63.9 39.598,40.302 28.602,40.302 28.602,47.798 30.7,47.798 30.75,47.803 30.8,47.798 30.898,47.807 30.992,47.836 31.079,47.882 31.155,47.945 31.218,48.021 31.264,48.108 31.293,48.202 31.302,48.3 31.302,72.498 39.2,72.498 39.225,72.5 46.798,72.5

## Other copper
Internal Plane 1 (plane layer: these items are gaps in the copper):
  rectangle: 209.8,72.4 227.1,94.6
  rectangle: 176.4,72.3 191.1,94.8
  rectangle: 143,72.5 157.7,94.5
  rectangle: 109.7,72.2 124.4,94.3
  rectangle: 76.5,71.7 91.6,94.1
  rectangle: 41.9,72.5 57.7,94.9
  rectangle: 225.3,27.9 227.4,82
  rectangle: 23.3,25.5 25.3,81.7
  rectangle: 23.7,21.9 227.6,30.5
  rectangle: 23.4,81.2 227.2,89
  lines w2: 24,31.2 227.29,31.2 ; 58.3,22.9 58.3,85.9 ; 91.7,23.1 91.7,86.1 ; 125.1,22.8 125.1,86.1 ; 158.3,22.9 158.3,86.1 ; 191.8,23.1 191.8,86
Internal Plane 2 (plane layer: these items are gaps in the copper):
  rectangle: 176.4,88.9 188.2,94.8
  rectangle: 143.6,89 154.7,94.7
  rectangle: 109.7,88.6 121.6,94.3
  rectangle: 42.5,88.7 53.4,94.3
  rectangle: 76.7,88.5 88.4,94
  rectangle: 190.8,29.8 192.8,72.7
  rectangle: 157.3,29.5 159.3,73.355
  rectangle: 124.1,29.1 126.1,72.6
  rectangle: 90.7,29.3 92.7,72.2
  rectangle: 57.3,30 59.3,72.9
  rectangle: 207.8,72.4 227.5,94.5
  rectangle: 173.1,72.3 192.8,89
  rectangle: 139.6,72.5 159.3,89
  rectangle: 106.4,72.2 126.1,89
  rectangle: 73,71.7 92.7,89
  rectangle: 39,72.5 59.3,89
  rectangle: 23.2,22.3 227.6,31.4
  rectangle: 24.9,29.8 227.9,31.1
  rectangle: 38.1,83 39.1,83.4
  rectangle: 23.2,81.2 227.7,89
  lines w0.254: 30.7,39.9 40.1,39.9 ; 30.7,48.3 30.8,48.3 ; 33.2,81.25 39.5,81.25 ; 67.3,81.5 73.6,81.5 ; 100.7,81.5 107,81.5 ; 134.1,81.5 140.4,81.5 ; 167.5,81.4 173.8,81.4 ; 180.1,117.1 180.4,117.1 ; 189.1,96.6 189.1,97.6 ; 201,81.3 207.3,81.3 ; 24.7,67.65 24.7,67.65
  lines w1: 23.3,117.1 30,117.1 ; 24.9,30.45 57.5,30.45 ; 30.7,48.3 28.1,48.3 28.1,39.8 39.7,39.8 ; 30.8,48.3 30.8,73 39.2,73 ; 40.1,39.9 40.1,63.9 53.3,63.9 53.3,68.5 51,68.5 47.3,68.5 47.3,72.8 ; 45.2,125 45.2,97.3 54.6,97.3 54.6,120.3 80.6,120.3 80.6,97.7 89.3,97.7 89.3,114.9 98,114.9 98,117.1 104.9,117.1 104.9,98.2 109.125,98.2 109.925,97.4 121.711,97.4 122.5,97.4 122.5,112.825 114.1,112.825 114.1,122.5 121.8,122.5 146.9,122.5 146.9,98.5 148.2,98.5 148.9,97.8 149.539,97.8 150.725,97.8 152.075,97.8 153.6,97.8 154.3,98.5 155.9,98.5 155.9,117.1 180.1,117.1 180.1,96.6 189.1,96.6 189.1,117.2 210.8,117.2 210.8,97.5 210.8,93.5 ; 59,30.7 91.6,30.7 ; 64.8,48.6 62.2,48.6 62.2,40.1 73.8,40.1 ; 65.5,47.6 62.9,47.6 62.9,39.1 74.5,39.1 ; 65.6,47.6 65.6,72.3 74,72.3 ; 74.9,39.2 74.9,63.2 88.1,63.2 88.1,67.8 ; 82.1,72.1 82.1,68.3 85.3,68.3 85.298,68.302 88.1,68.302 ; 92.4,30.7 125,30.7 ; 98.2,48.6 95.7,48.6 95.7,40.1 107.2,40.1 ; 98.6,48 96,48 96,39.5 107.6,39.5 ; 98.7,48 98.7,72.7 107.1,72.7 ; 108,39.6 108,63.6 121.2,63.6 121.2,68.2 115.2,68.2 115.2,72.5 ; 125.8,30.7 158.4,30.7 ; 131.6,48.6 129,48.6 129,40.1 140.6,40.1 ; 132.4,48.3 129.8,48.3 129.8,39.8 141.4,39.8 ; 132.5,48.3 132.5,73 140.9,73 ; 141.8,39.9 141.8,63.9 155,63.9 155,68.5 149,68.5 149,72.8 ; 159.2,30.6 191.8,30.6 ; 165,48.5 162.4,48.5 162.4,40 174,40 ; 165.6,48.3 163,48.3 163,39.8 174.6,39.8 ; 165.7,48.3 165.7,73 174.1,73 ; 175,39.9 175,63.9 188.2,63.9 188.2,68.5 182.2,68.5 182.2,72.8 ; 192.7,30.5 225.3,30.5 ; 198.5,48.2 195.9,48.2 195.9,39.7 207.5,39.7 ; 199.2,48.3 196.6,48.3 196.6,39.8 208.2,39.8 ; 199.3,48.3 199.3,73 207.7,73 ; 208.6,39.9 208.6,63.9 221.8,63.9 221.8,68.5 215.8,68.5 215.8,72.8

## Silkscreen, mask and mechanical layers (free items; w line width, h text height)
Top Overlay:
  lines w0.254: 24.2,29.6 24.2,85 227.2,85 227.2,22.4 ; 58.3,85 58.5,84.8 58.5,22.4 ; 84,25.9 84,26 ; 91.7,84.9 91.9,84.7 91.9,22.4 ; 125.1,22.4 125.1,85 ; 125.2,22.4 125.8,22.4 158.5,22.4 ; 125.3,22.4 92.4,22.4 91.9,22.4 ; 158.3,22.4 158.3,85 ; 158.4,22.4 159,22.4 192,22.4 ; 191.8,25 191.8,85 ; 192,41.9 192,22.4 ; 58.5,22.4 24.7,22.4 24.2,22.4 24.2,29.9 58.5,29.9 ; 58.5,22.4 91.9,22.4 ; 58.5,22.4 58.5,29.9 ; 58.5,29.9 91.9,29.9 ; 91.9,22.4 91.9,29.9 ; 91.9,29.9 125.3,29.9 158.5,29.9 192,29.9 227.2,29.9 227.2,22.4 ; 192,22.4 192.5,22.4 227.2,22.4 ; 125.3,41.9 125.3,41.9
  text "UL" at 96,33.3 h0.7
  text "UL" at 129.4,33.3 h0.7
  text "UL" at 196.3,33.1 h0.7
Mechanical 1:
  lines w0.254: 23.5,21.9 227.8,21.9 227.8,23.1 227.8,23.4 ; 23.7,21.9 23.3,21.9 23.3,125 227.8,125 227.8,24.6 227.8,24.2 227.8,23.8 ; 227.8,23.4 227.8,23.8 ; 227.8,23.4 227.8,23.8 ; 227.8,23.4 227.8,23.8

## Text inside footprints (layer, text, board x,y; h text height)
D125: Mechanical 7 "Default Padstyle: RX91Y89D0T" at 95.39,42.985 h1.27 r180; Mechanical 7 "Alt 1 Padstyle: OX60Y90D30P" at 95.072,44.89 h1.27 r180; Mechanical 7 "Alt 2 Padstyle: OX90Y60D30P" at 95.072,46.795 h1.27 r180; Mechanical 7 "0.22in/5.588mm" at 88.722,27.301 h0.64 r180; Mechanical 7 "0.063in/1.6mm" at 90.558,29.841 h0.64 r180; Mechanical 7 "0.087in/2.21mm" at 80.658,33.917 h0.64 r180; Mechanical 7 "0.156in/3.962mm" at 78.613,33.917 h0.64 r180; Mechanical 7 "0.181in/4.597mm" at 88.881,39.264 h0.64 r180
D126: Mechanical 7 "0.181in/4.597mm" at 55.781,39.064 h0.64 r180; Mechanical 7 "0.156in/3.962mm" at 45.513,33.717 h0.64 r180; Mechanical 7 "0.087in/2.21mm" at 47.558,33.717 h0.64 r180; Mechanical 7 "0.063in/1.6mm" at 57.458,29.641 h0.64 r180; Mechanical 7 "0.22in/5.588mm" at 55.622,27.101 h0.64 r180; Mechanical 7 "Alt 2 Padstyle: OX90Y60D30P" at 61.972,46.595 h1.27 r180; Mechanical 7 "Alt 1 Padstyle: OX60Y90D30P" at 61.972,44.69 h1.27 r180; Mechanical 7 "Default Padstyle: RX91Y89D0T" at 62.29,42.785 h1.27 r180
D127: Mechanical 7 "0.181in/4.597mm" at 155.581,39.264 h0.64 r180; Mechanical 7 "0.156in/3.962mm" at 145.313,33.917 h0.64 r180; Mechanical 7 "0.087in/2.21mm" at 147.358,33.917 h0.64 r180; Mechanical 7 "0.063in/1.6mm" at 157.258,29.841 h0.64 r180; Mechanical 7 "0.22in/5.588mm" at 155.422,27.301 h0.64 r180; Mechanical 7 "Alt 2 Padstyle: OX90Y60D30P" at 161.772,46.795 h1.27 r180; Mechanical 7 "Alt 1 Padstyle: OX60Y90D30P" at 161.772,44.89 h1.27 r180; Mechanical 7 "Default Padstyle: RX91Y89D0T" at 162.09,42.985 h1.27 r180
D128: Mechanical 7 "0.181in/4.597mm" at 122.181,39.364 h0.64 r180; Mechanical 7 "0.156in/3.962mm" at 111.913,34.017 h0.64 r180; Mechanical 7 "0.087in/2.21mm" at 113.958,34.017 h0.64 r180; Mechanical 7 "0.063in/1.6mm" at 123.858,29.941 h0.64 r180; Mechanical 7 "0.22in/5.588mm" at 122.022,27.401 h0.64 r180; Mechanical 7 "Alt 2 Padstyle: OX90Y60D30P" at 128.372,46.895 h1.27 r180; Mechanical 7 "Alt 1 Padstyle: OX60Y90D30P" at 128.372,44.99 h1.27 r180; Mechanical 7 "Default Padstyle: RX91Y89D0T" at 128.69,43.085 h1.27 r180
D129: Mechanical 7 "0.181in/4.597mm" at 217.119,27.736 h0.64; Mechanical 7 "0.156in/3.962mm" at 227.387,33.082 h0.64; Mechanical 7 "0.087in/2.21mm" at 225.342,33.082 h0.64; Mechanical 7 "0.063in/1.6mm" at 215.442,37.159 h0.64; Mechanical 7 "0.22in/5.588mm" at 217.278,39.699 h0.64; Mechanical 7 "Alt 2 Padstyle: OX90Y60D30P" at 210.928,20.205 h1.27; Mechanical 7 "Alt 1 Padstyle: OX60Y90D30P" at 210.928,22.11 h1.27; Mechanical 7 "Default Padstyle: RX91Y89D0T" at 210.61,24.015 h1.27